# Altium PCB STM_System_Board.PCBDOC (part 13 of 16)
Units mm, origin at the board's own origin, x right, y up, seen from the top; angles counter-clockwise.
Board outline 222.53 x 100.01 mm, 6 copper layers (Top Layer, Int1 (GND), Int2 (Sign), Layer 1, Layer 2, Bottom Layer), stack 1.526 mm thick; 702 components, 774 nets, 3596 pads, 1988 vias.
Unrouted connection lines stored in the file: 1.
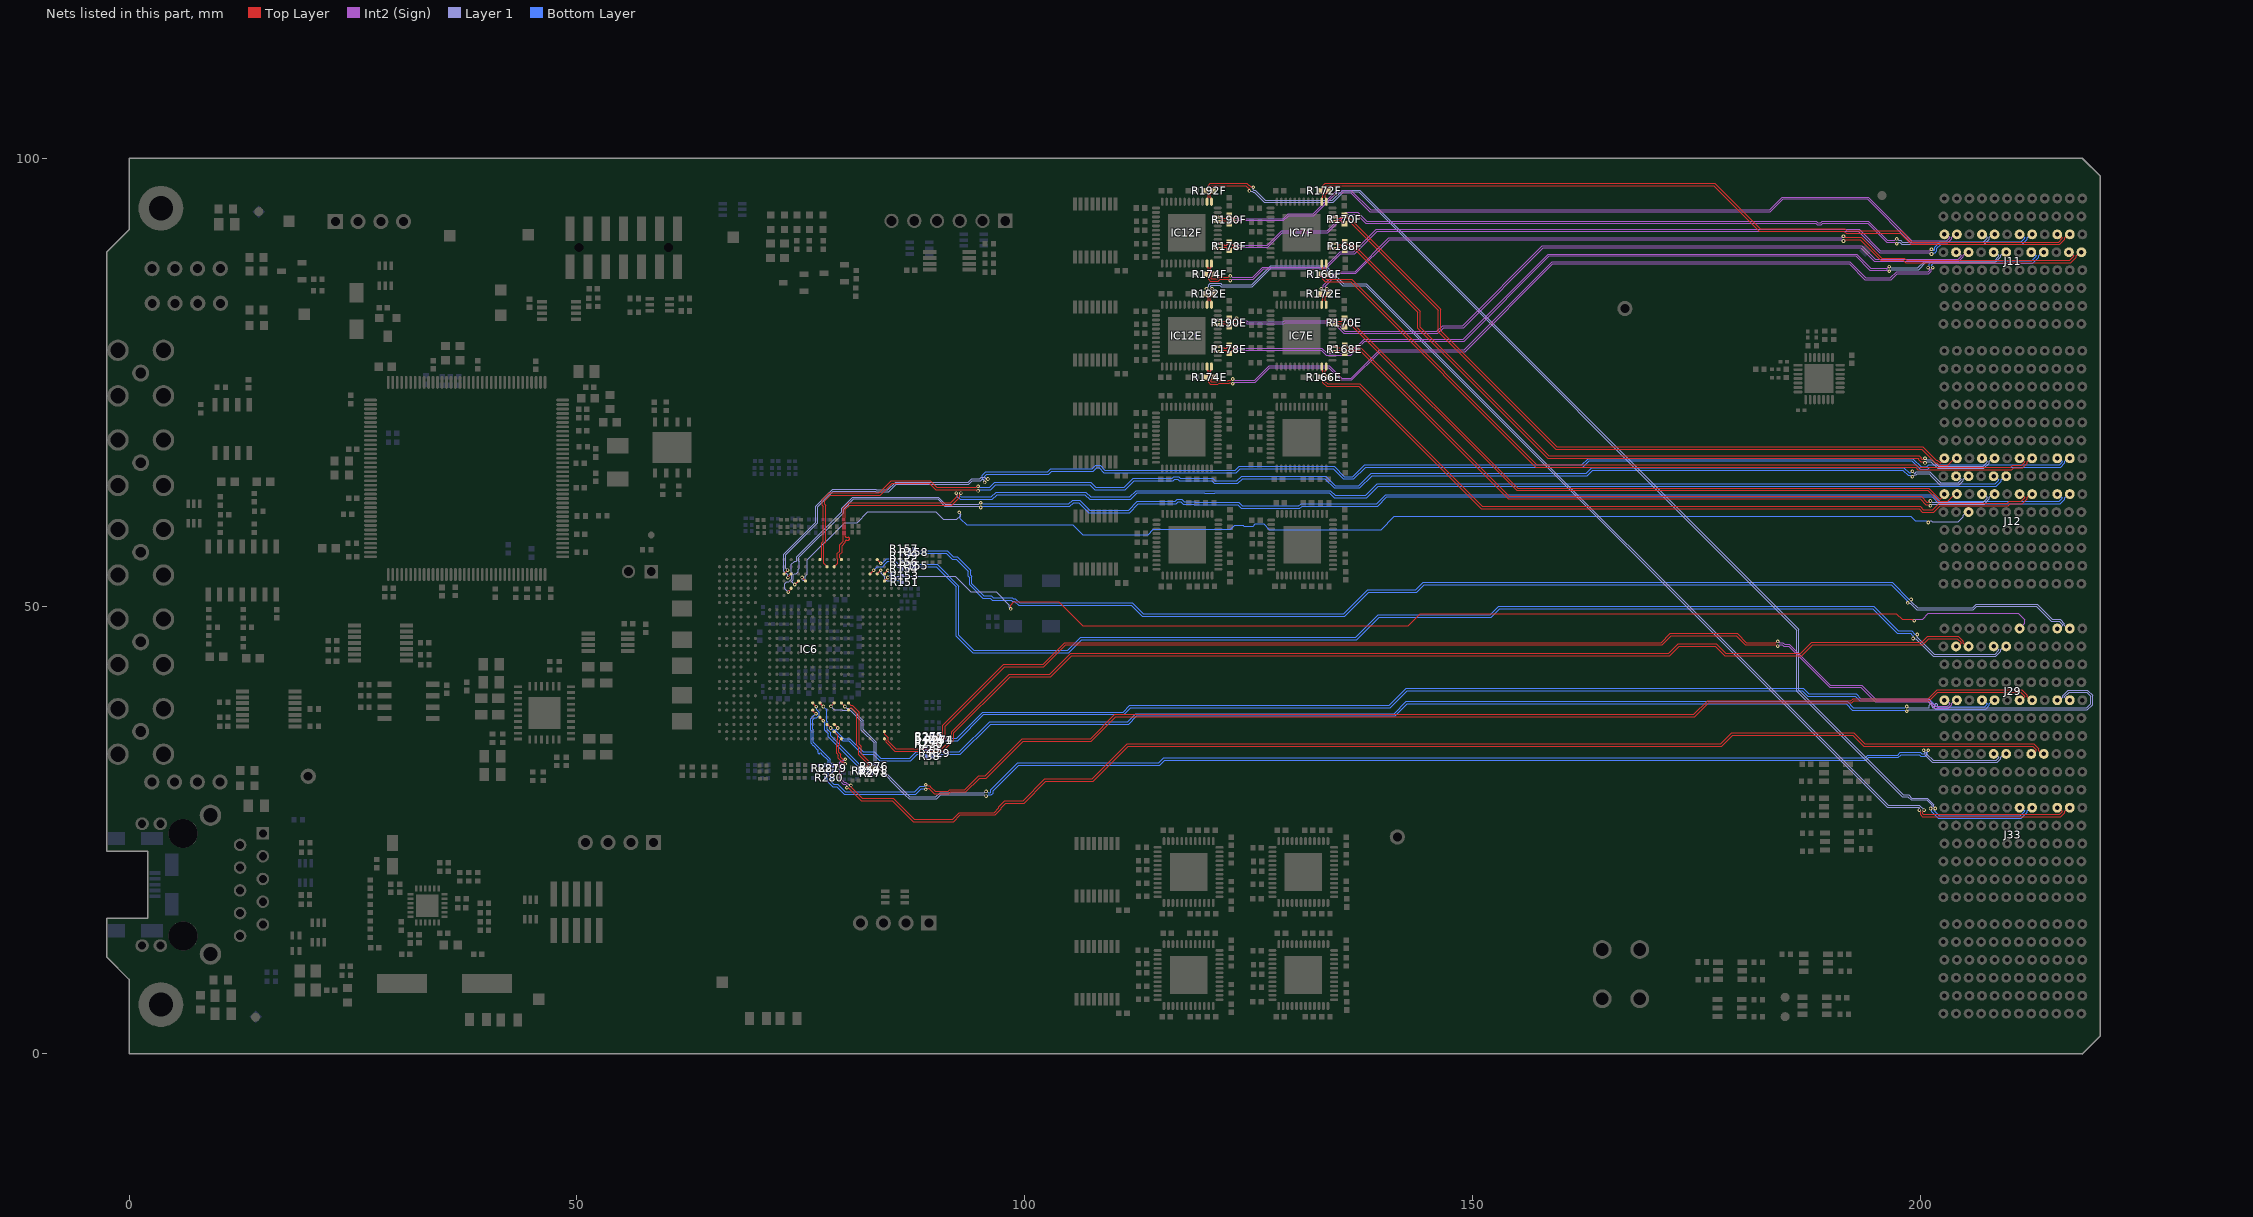
[diagram p16: the nets of this part, all layers, seen from the top]

## Via types
v1: diameter 0.4, hole 0.2, Top Layer to Bottom Layer, tented both sides, 1806 vias
v2: diameter 0.7, hole 0.4, Top Layer to Bottom Layer, tented both sides, 92 vias
v3: diameter 0.7, hole 0.4, Top Layer to Bottom Layer, 90 vias

## Nets (pads, with @x,y where several pads share a name; then routed paths per layer and width w, separated by ;. In a path a pad name is that pad's centre, name@x,y a point inside that pad or via, vN(x,y) a via of type N, cw(c..) or ccw(c..) an arc to the next point about the centre after c; other vN are vias at no path point) (continued)
SLOT5.LVDS_6_P: IC6.P4 J12.J5 | length 140.1
  Top Layer w0.095: v1(75.125,53.2) 75.125,53.174 IC6.P4@75.515,52.784
  Layer 1 w0.102: v1(75.125,53.2) 75.174,53.151 75.174,52.954 75.234,52.894 75.318,52.894 75.477,53.054 75.477,53.314 75.711,53.547 75.711,55.139 79.886,59.314 81.264,59.314 82.475,60.525 90.053,60.525 90.903,59.675 92.407,59.675 92.832,60.1 92.832,60.241 92.675,60.398 v1(92.675,60.45) ; v1(200.85,59.325) 200.865,59.325 201.059,59.519 201.154,59.519 201.262,59.411 204.192,59.411 204.746,59.965 204.746,60.138 205.098,60.49 J12.J5@205.339,60.49
  Bottom Layer w0.095: v1(92.675,60.45) 92.675,60.372 92.805,60.242 92.805,59.768 93.498,59.075 104.295,59.075 104.32,59.1 104.63,59.1 104.655,59.075 105.35,59.075 106.445,57.98 113.757,57.98 114.352,58.575 123.004,58.575 123.431,59.002 124.352,59.002 124.424,58.93 125.475,58.93 125.704,59.159 126.664,59.159 127.289,58.533 139.783,58.533 141.258,60.008 198.889,60.008 199.384,59.514 200.642,59.514 200.831,59.325 v1(200.85,59.325)
SLOT5.LVDS_7_N: IC6.T5 J12.C6 | length 153.5
  Top Layer w0.095: v1(73.575,51.55) 73.575,51.597 73.915,51.937 IC6.T5@73.915,51.984
  Layer 1 w0.102: v1(73.575,51.55) 73.172,51.953 73.172,52.506 73.394,52.728 73.666,52.728 73.784,52.846 73.784,52.875 73.957,53.048 73.957,53.61 74.014,53.667 74.014,53.751 73.937,53.828 73.937,54.657 74.295,55.015 74.489,55.015 74.549,55.074 74.549,55.526 79.55,60.528 79.55,60.914 80.8,62.164 90.336,62.164 91.13,61.37 94.866,61.37 95.023,61.527 v1(95.075,61.527)
  Bottom Layer w0.095: v1(95.075,61.527) 95.153,61.527 95.283,61.397 104.897,61.397 105.317,61.817 106.136,61.817 107.252,60.7 108.075,60.7 111.573,60.7 112.548,61.675 116.774,61.675 116.995,61.897 117.527,61.897 117.798,61.625 118.953,61.625 119,61.578 123.847,61.578 124.25,61.175 130.598,61.175 130.852,61.429 139.252,61.429 140.262,62.439 201.386,62.439 202.125,61.7 215.473,61.7 215.805,62.032 215.805,62.111 215.426,62.49 J12.C6@215.239,62.49
SLOT5.LVDS_7_P: IC6.R4 J12.B6 | length 152.3
  Top Layer w0.095: v1(74.3,52.4) 74.331,52.4 IC6.R4@74.715,52.784
  Layer 1 w0.102: v1(74.3,52.4) 73.998,52.702 73.998,52.786 74.171,52.959 74.171,53.521 74.256,53.606 74.471,53.606 74.693,53.828 74.693,54.096 74.829,54.232 74.829,54.948 74.763,55.015 74.763,55.438 79.764,60.439 79.764,60.825 80.889,61.95 90.247,61.95 91.041,61.157 94.866,61.157 95.023,61 v1(95.075,61)
  Bottom Layer w0.095: v1(95.075,61) 95.153,61 95.283,61.13 105.007,61.13 105.427,61.55 106.025,61.55 107.142,60.433 111.683,60.433 112.658,61.408 116.884,61.408 117.106,61.63 117.416,61.63 117.688,61.358 118.843,61.358 118.889,61.311 123.736,61.311 124.139,60.908 130.708,60.908 130.962,61.162 139.362,61.162 140.373,62.172 201.275,62.172 202.014,61.433 215.584,61.433 216.072,61.921 216.072,62.111 216.452,62.49 J12.B6@216.639,62.49
SLOT5.LVDS_8_N: IC7E.48 J12.F6 R166E.2 | length 87.4
  Top Layer w0.095: IC7E.48@133.629,76.729 133.629,76.388 133.512,76.271 133.512,76.101 133.536,76.077 133.536,75.832 133.592,75.777 133.631,75.777 133.873,75.534 R166E.2@133.873,75.514 133.873,75.494 133.631,75.252 133.592,75.252 133.536,75.196 133.536,75.062 133.798,74.8 137.352,74.8 151.027,61.125 199.925,61.125 200.3,60.75 201.348,60.75 202.079,61.481 204.349,61.481 204.356,61.475 204.922,61.475 204.928,61.481 209.655,61.481 209.876,61.702 211.231,61.702 211.605,62.077 211.605,62.156 211.271,62.49 J12.F6@211.039,62.49
SLOT5.LVDS_8_P: IC7E.47 J12.E6 R166E.1 | length 88.3
  Top Layer w0.095: IC7E.47@133.129,76.729 133.129,76.388 133.246,76.271 133.246,75.991 133.27,75.967 133.27,75.832 133.214,75.777 133.176,75.777 132.933,75.534 R166E.1@132.933,75.514 132.933,75.494 133.176,75.252 133.214,75.252 133.27,75.196 133.27,74.951 133.688,74.533 137.242,74.533 150.917,60.858 199.814,60.858 200.189,60.483 201.458,60.483 202.189,61.214 204.239,61.214 204.245,61.208 205.032,61.208 205.039,61.214 209.765,61.214 209.986,61.436 211.341,61.436 211.872,61.967 211.872,62.156 212.206,62.49 J12.E6@212.439,62.49
SLOT5.LVDS_9_N: IC7E.4 J12.I6 R168E.2 | length 81.8
  Top Layer w0.095: IC7E.4@134.329,78.929 134.67,78.929 134.787,78.813 135.026,78.813 135.03,78.817 135.363,78.817 135.418,78.873 135.418,78.911 135.661,79.154 R168E.2@135.681,79.154 135.701,79.154 135.943,78.911 135.943,78.873 135.999,78.817 137.511,78.817 154.078,62.25 200.036,62.25 200.691,61.595 200.867,61.595 200.997,61.725 v1(201.075,61.725)
  Layer 1 w0.102: v1(201.075,61.725) 201.127,61.725 201.284,61.568 202.088,61.568 202.119,61.6 206.978,61.6 207.432,62.054 207.432,62.138 207.08,62.49 J12.I6@206.839,62.49
SLOT5.LVDS_9_P: IC7E.3 J12.H6 R168E.1 | length 82.1
  Top Layer w0.095: IC7E.3@134.329,78.429 134.67,78.429 134.787,78.546 135.136,78.546 135.141,78.55 135.363,78.55 135.418,78.495 135.418,78.456 135.661,78.214 R168E.1@135.681,78.214 135.701,78.214 135.943,78.456 135.943,78.495 135.999,78.55 137.4,78.55 153.967,61.983 199.925,61.983 200.581,61.328 200.867,61.328 200.997,61.198 v1(201.075,61.198)
  Layer 1 w0.102: v1(201.075,61.198) 201.127,61.198 201.284,61.355 202.176,61.355 202.208,61.386 207.067,61.386 207.646,61.965 207.646,62.138 207.998,62.49 J12.H6@208.239,62.49
SLOT5.LVDS_10_N: IC7E.10 J12.L6 R170E.2 | length 77.2
  Top Layer w0.095: IC7E.10@134.329,81.929 134.67,81.929 134.787,81.813 135.032,81.813 135.064,81.781 135.358,81.781 135.413,81.836 135.413,81.875 135.656,82.117 R170E.2@135.676,82.117 135.696,82.117 135.938,81.875 135.938,81.836 135.994,81.781 136.397,81.781 155.012,63.166 200.884,63.166 202.08,61.97 202.258,61.97 202.639,62.351 J12.L6@202.639,62.49
SLOT5.LVDS_10_P: IC7E.9 J12.K6 R170E.1 | length 78.6
  Top Layer w0.095: IC7E.9@134.329,81.429 134.67,81.429 134.787,81.546 134.921,81.546 134.954,81.514 135.358,81.514 135.413,81.458 135.413,81.42 135.656,81.177 R170E.1@135.676,81.177 135.696,81.177 135.938,81.42 135.938,81.458 135.994,81.514 136.286,81.514 154.901,62.899 200.774,62.899 201.969,61.703 203.02,61.703 203.806,62.49 J12.K6@204.039,62.49
SLOT5.LVDS_11_N: IC7E.14 J11.B5 R172E.2 | length 90.7
  Top Layer w0.095: v1(133.092,85.417) 133.092,84.988 R172E.2@132.935,84.832 132.935,84.812 133.178,84.569 133.216,84.569 133.272,84.513 133.272,84.359 133.246,84.332 133.246,84.088 133.129,83.971 IC7E.14@133.129,83.629 ; v1(191.375,91.275) 191.453,91.275 191.583,91.145 193.355,91.145 195.653,88.847 198.16,88.847 198.435,88.572 216.645,88.572 217.105,89.032 217.105,89.111 216.726,89.49 J11.B5@216.539,89.49
  Int2 (Sign) w0.102: v1(133.092,85.417) 133.298,85.625 133.298,85.797 134.84,87.339 136.85,87.339 140.625,91.114 190.269,91.114 190.274,91.118 191.166,91.118 191.323,91.275 v1(191.375,91.275)
SLOT5.LVDS_11_P: IC7E.13 J11.A5 R172E.1 | length 90.8
  Top Layer w0.095: IC7E.13@133.629,83.629 133.629,83.985 133.512,84.101 133.512,84.222 133.539,84.248 133.539,84.513 133.594,84.569 133.633,84.569 133.875,84.812 R172E.1@133.875,84.832 133.719,84.988 v1(133.719,85.417) ; v1(191.375,90.748) 191.453,90.748 191.583,90.878 193.245,90.878 195.543,88.58 198.049,88.58 198.324,88.305 216.756,88.305 217.372,88.921 217.372,89.111 217.752,89.49 J11.A5@217.939,89.49
  Int2 (Sign) w0.102: v1(133.719,85.417) 133.512,85.625 133.512,85.709 134.929,87.125 136.939,87.125 140.714,90.9 190.358,90.9 190.362,90.905 191.166,90.905 191.323,90.748 v1(191.375,90.748)
SLOT5.LVDS_12_N: IC12E.48 J11.E5 R174E.2 | length 104.1
  Top Layer w0.095: IC12E.48@120.829,76.729 120.829,76.388 120.712,76.271 120.712,76.142 120.772,76.081 120.772,75.837 120.828,75.781 120.867,75.781 121.109,75.538 R174E.2@121.109,75.518 121.109,75.498 120.867,75.256 120.828,75.256 120.772,75.2 120.772,75.066 120.828,75.01 121.436,75.01 121.576,75.15 122.687,75.15 122.747,75.21 122.992,75.21 123.122,75.34 v1(123.2,75.34)
  Int2 (Sign) w0.102: v1(123.2,75.34) 123.252,75.34 123.409,75.183 125.633,75.183 127.263,76.813 133.99,76.813 135.353,75.45 136.425,75.45 139.589,78.614 149.061,78.614 158.861,88.414 192.086,88.414 193.861,86.639 196.611,86.639 197.299,87.326 200.824,87.326 200.98,87.482 200.98,87.566 200.823,87.723 v1(200.823,87.775)
  Bottom Layer w0.095: v1(200.823,87.775) 200.823,87.853 200.953,87.983 200.953,88.228 201.267,88.542 212.415,88.542 212.905,89.032 212.905,89.111 212.526,89.49 J11.E5@212.339,89.49
SLOT5.LVDS_12_P: IC12E.47 J11.D5 R174E.1 | length 104.9
  Top Layer w0.095: IC12E.47@120.329,76.729 120.329,76.388 120.446,76.271 120.446,76.031 120.506,75.971 120.506,75.837 120.45,75.781 120.412,75.781 120.169,75.538 R174E.1@120.169,75.518 120.169,75.498 120.412,75.256 120.45,75.256 120.506,75.2 120.506,74.955 120.718,74.744 121.546,74.744 121.686,74.883 122.798,74.883 122.858,74.943 122.992,74.943 123.122,74.813 v1(123.2,74.813)
  Int2 (Sign) w0.102: v1(123.2,74.813) 123.252,74.813 123.409,74.969 125.722,74.969 127.351,76.599 133.901,76.599 135.264,75.236 136.514,75.236 139.678,78.4 149.15,78.4 158.95,88.2 191.997,88.2 193.772,86.425 196.7,86.425 197.387,87.112 200.912,87.112 201.193,87.393 201.193,87.566 201.35,87.723 v1(201.35,87.775)
  Bottom Layer w0.095: v1(201.35,87.775) 201.35,87.853 201.22,87.983 201.22,88.118 201.377,88.275 212.526,88.275 213.172,88.921 213.172,89.111 213.552,89.49 J11.D5@213.739,89.49
SLOT5.LVDS_13_N: IC12E.4 J11.H5 R178E.2 | length 94.7
  Top Layer w0.095: IC12E.4@121.529,78.929 121.87,78.929 121.987,78.813 122.232,78.813 122.252,78.792 122.514,78.792 122.57,78.848 122.57,78.887 122.812,79.129 R178E.2@122.832,79.129 122.852,79.129 123.095,78.887 123.095,78.849 123.151,78.793 123.336,78.793 123.515,78.973 v1(123.544,78.973)
  Int2 (Sign) w0.102: v1(123.544,78.973) 123.547,78.973 123.753,78.767 133.158,78.767 133.736,78.189 136.261,78.189 137.867,79.794 148.942,79.794 158.436,89.289 192.836,89.289 194.403,87.722 196.091,87.722 196.094,87.725 196.252,87.725 196.423,87.895 v1(196.475,87.895)
  Layer 1 w0.102: v1(196.475,87.895) 196.527,87.895 196.684,87.739 199.664,87.739 200.489,88.564 208.242,88.564 208.732,89.054 208.732,89.138 208.38,89.49 J11.H5@208.139,89.49
SLOT5.LVDS_13_P: IC12E.3 J11.G5 R178E.1 | length 95.1
  Top Layer w0.095: IC12E.3@121.529,78.429 121.87,78.429 121.987,78.546 122.121,78.546 122.142,78.526 122.514,78.526 122.57,78.47 122.57,78.432 122.812,78.189 R178E.1@122.832,78.189 122.852,78.189 123.095,78.432 123.095,78.47 123.152,78.527 123.336,78.527 123.515,78.347 v1(123.544,78.347)
  Int2 (Sign) w0.102: v1(123.544,78.347) 123.547,78.347 123.753,78.553 133.069,78.553 133.647,77.975 136.35,77.975 137.955,79.58 149.03,79.58 158.525,89.075 192.747,89.075 194.314,87.508 196.179,87.508 196.182,87.511 196.266,87.511 196.409,87.368 v1(196.475,87.368)
  Layer 1 w0.102: v1(196.475,87.368) 196.527,87.368 196.684,87.525 199.753,87.525 200.578,88.35 208.331,88.35 208.946,88.965 208.946,89.138 209.298,89.49 J11.G5@209.539,89.49
SLOT5.LVDS_14_N: IC12E.10 J11.K5 R190E.2 | length 89.7
  Top Layer w0.095: IC12E.10@121.529,81.929 121.87,81.929 121.987,81.813 122.232,81.813 122.265,81.78 122.514,81.78 122.569,81.836 122.569,81.874 122.812,82.117 R190E.2@122.832,82.117 122.852,82.117 123.124,81.845 123.229,81.845 123.241,81.857 123.43,81.857 123.624,82.051 v1(123.624,82.114)
  Int2 (Sign) w0.102: v1(123.624,82.114) 123.907,81.831 124.781,81.831 124.88,81.732 128.832,81.732 128.957,81.857 134.496,81.857 135.706,80.647 145.987,80.647 146.64,81.3 148.872,81.3 157.761,90.189 193.411,90.189 194.911,88.689 195.627,88.689 195.63,88.692 196.12,88.692 196.123,88.689 204.167,88.689 204.532,89.054 204.532,89.138 204.18,89.49 J11.K5@203.939,89.49
SLOT5.LVDS_14_P: IC12E.9 J11.J5 R190E.1 | length 90.2
  Top Layer w0.095: IC12E.9@121.529,81.429 121.87,81.429 121.987,81.546 122.121,81.546 122.154,81.513 122.514,81.513 122.569,81.458 122.569,81.419 122.812,81.177 R190E.1@122.832,81.177 122.852,81.177 123.094,81.419 123.094,81.458 123.215,81.578 123.339,81.578 123.351,81.59 123.43,81.59 123.624,81.396 v1(123.624,81.333)
  Int2 (Sign) w0.102: v1(123.624,81.333) 123.907,81.617 124.693,81.617 124.791,81.518 128.92,81.518 129.045,81.643 134.407,81.643 135.617,80.433 146.076,80.433 146.729,81.086 148.961,81.086 157.85,89.975 193.322,89.975 194.822,88.475 195.716,88.475 195.719,88.478 196.031,88.478 196.034,88.475 204.256,88.475 204.746,88.965 204.746,89.138 205.098,89.49 J11.J5@205.339,89.49
SLOT5.LVDS_15_N: IC12E.14 J33.C6 R192E.2 | length 125.6
  Top Layer w0.095: v1(120.269,85.417) 120.269,85.01 R192E.2@120.112,84.854 120.112,84.834 120.355,84.591 120.393,84.591 120.449,84.536 120.449,84.336 120.446,84.332 120.446,84.088 120.329,83.971 IC12E.14@120.329,83.629 ; v1(200.376,27.226) 200.376,27.149 200.246,27.018 200.246,26.827 200.308,26.765 215.539,26.765 215.805,27.032 215.805,27.111 215.426,27.49 J33.C6@215.239,27.49
  Layer 1 w0.102: v1(120.269,85.417) 120.269,85.442 120.506,85.678 120.506,85.842 120.691,86.027 121.84,86.027 122.003,85.864 125.314,85.864 127.439,87.989 133.564,87.989 135.578,85.975 138.128,85.975 196.355,27.747 198.699,27.747 198.724,27.771 199.855,27.771 200.376,27.25 v1(200.376,27.226)
SLOT5.LVDS_15_P: IC12E.13 J33.B6 R192E.1 | length 125.7
  Top Layer w0.095: IC12E.13@120.829,83.629 120.829,83.971 120.712,84.088 120.712,84.222 120.716,84.225 120.716,84.536 120.771,84.591 120.81,84.591 121.052,84.834 R192E.1@121.052,84.854 120.889,85.017 v1(120.889,85.424) ; v1(199.848,27.225) 199.848,27.148 199.979,27.017 199.979,26.717 200.197,26.499 215.649,26.499 216.072,26.921 216.072,27.111 216.452,27.49 J33.B6@216.639,27.49
  Layer 1 w0.102: v1(120.889,85.424) 120.889,85.463 120.72,85.633 120.72,85.753 120.779,85.813 121.751,85.813 121.914,85.65 125.403,85.65 127.528,87.775 133.475,87.775 135.489,85.761 138.039,85.761 196.267,27.533 198.788,27.533 198.812,27.557 199.766,27.557 199.826,27.498 199.826,27.247 v1(199.848,27.225)
SLOT5.LVDSr0_N: IC6.H21 R261.1 | length 8.5
  Top Layer w0.095: IC6.H21@80.315,39.184 80.315,39.148 80.546,38.917 80.735,38.917 81.517,38.136 81.517,34.561 81.725,34.352 81.725,33.483 82.556,32.652 82.58,32.652 82.792,32.44 82.792,32.195 82.848,32.139 82.882,32.139 83.045,31.977 R261.1@83.045,31.957
SLOT5.LVDSr0_P: IC6.H22 R259.1 | length 8.1
  Top Layer w0.095: IC6.H22@80.315,38.384 80.315,38.42 80.546,38.651 80.624,38.651 81.25,38.025 81.25,34.45 81.458,34.242 81.458,33.372 82.445,32.385 82.47,32.385 82.525,32.329 82.525,32.195 82.47,32.139 82.435,32.139 82.273,31.977 R259.1@82.273,31.957
SLOT5.LVDSr1_N: IC6.M23 R278.1 | length 9.1
  Top Layer w0.095: IC6.M23@77.09,37.584 v1(77.49,37.184)
  Bottom Layer w0.095: v1(77.49,37.184) 77.49,37.135 77.649,36.976 77.649,36.143 78.05,35.742 78.05,35.434 81.912,31.572 82.605,31.572 82.661,31.516 82.661,31.481 82.823,31.318 R278.1@82.843,31.318
SLOT5.LVDSr1_P: IC6.M21 R276.1 | length 10.3
  Top Layer w0.095: IC6.M21@77.115,39.184 v1(77.515,38.784)
  Bottom Layer w0.095: v1(77.515,38.784) 77.889,38.41 77.889,37.112 77.915,37.086 77.915,36.254 78.317,35.853 78.317,35.544 82.022,31.839 82.607,31.839 82.663,31.894 82.663,31.928 82.825,32.09 R276.1@82.845,32.09
SLOT5.LVDSr3_N: IC6.C3 R153.1 | length 2.6
  Top Layer w0.095: IC6.C3@84.315,53.584 v1(84.715,53.984)
  Bottom Layer w0.095: v1(84.715,53.984) 84.715,53.909 84.906,53.717 85.095,53.717 85.654,53.159 86.004,53.159 86.06,53.214 86.06,53.23 86.223,53.393 R153.1@86.243,53.393
SLOT5.LVDSr3_P: IC6.C4 R151.1 | length 2.5
  Top Layer w0.095: IC6.C4@84.315,52.784 v1(84.715,53.184)
  Bottom Layer w0.095: v1(84.715,53.184) 84.715,53.259 84.906,53.451 84.985,53.451 85.543,52.892 86,52.892 86.056,52.836 86.056,52.728 R151.1@86.128,52.656
SLOT6.LVDS_0_N: J29.C4 R29.1 R38.2 | length 138.6
  Layer 1 w0.102: v1(198.45,38.255) 198.502,38.255 198.659,38.411 218.614,38.411 219.189,38.986 219.189,40.039 218.614,40.614 216.467,40.614 215.832,39.979 215.832,39.806 215.772,39.747 215.766,39.747 215.509,39.49 J29.C4@215.239,39.49
  Bottom Layer w0.095: R38.2@89.701,33.216 89.721,33.216 89.884,33.378 89.884,33.413 89.939,33.469 90.298,33.469 R29.1@90.49,33.277 ; R29.1@90.49,33.257 R29.1@90.49,33.277 ; v1(198.45,38.255) 198.372,38.255 198.242,38.385 195.44,38.385 195.439,38.383 192.364,38.383 191.664,39.083 142.683,39.083 141.325,37.725 112.5,37.725 111.6,36.825 96.177,36.825 92.806,33.454 90.708,33.454 90.694,33.44 90.653,33.44 R29.1@90.49,33.277
SLOT6.LVDS_0_P: J29.B4 R28.2 R29.2 | length 138.9
  Layer 1 w0.102: v1(198.45,38.782) 198.502,38.782 198.659,38.625 200.775,38.625 200.826,38.625 ccw(c200.826,38.776) 200.977,38.776 200.977,38.945 cw(c201.127,38.945) 201.278,38.945 201.278,38.776 ccw(c201.429,38.776) 201.58,38.776 201.58,38.945 cw(c201.731,38.945) 201.881,38.945 201.881,38.776 ccw(c202.032,38.776) 202.032,38.625 202.4,38.625 218.525,38.625 218.975,39.075 218.975,39.95 218.525,40.4 216.556,40.4 216.046,39.89 216.046,39.806 216.105,39.747 216.112,39.747 216.369,39.49 J29.B4@216.639,39.49
  Bottom Layer w0.095: R28.2@89.696,33.986 89.716,33.986 89.878,33.824 89.878,33.791 89.934,33.736 90.328,33.736 90.49,33.898 R29.2@90.49,33.917 ; R29.2@90.49,33.897 90.653,33.735 90.694,33.735 90.708,33.72 92.695,33.72 96.067,37.092 111.489,37.092 112.389,37.992 141.214,37.992 142.573,39.35 191.775,39.35 192.475,38.65 195.328,38.65 195.33,38.651 198.242,38.651 198.372,38.782 v1(198.45,38.782)
SLOT6.LVDS_1_N: J29.F4 R280.1 R281.2 | length 141.9
  Top Layer w0.095: v1(88.925,29.528) 89.003,29.528 89.133,29.658 89.266,29.658 89.4,29.524 89.865,29.059 91.542,29.059 91.734,29.25 93.425,29.25 94.975,30.8 95.702,30.8 99.836,34.933 107.436,34.933 110.161,37.658 174.786,37.658 176.311,39.183 192.325,39.183 192.55,39.408 200.961,39.408 201.927,40.375 211.178,40.375 211.605,39.948 211.605,39.869 211.226,39.49 J29.F4@211.039,39.49
  Bottom Layer w0.095: R281.2@77.775,31.57 77.775,31.55 77.938,31.388 77.972,31.388 78.028,31.332 78.028,31.054 78.002,31.029 78.002,30.988 R280.1@77.84,30.825 ; R280.1@77.82,30.825 R280.1@77.84,30.825 ; v1(88.925,29.528) 88.872,29.528 88.775,29.625 88.427,29.625 87.811,29.008 79.863,29.008 79.022,29.85 78.529,29.85 78.017,30.362 78.017,30.607 78.002,30.621 78.002,30.663 R280.1@77.84,30.825
SLOT6.LVDS_1_P: J29.E4 R279.2 R280.2 | length 141.9
  Top Layer w0.095: v1(88.925,30.055) 89.003,30.055 89.133,29.925 89.377,29.925 89.511,29.791 89.976,29.325 91.432,29.325 91.623,29.517 93.314,29.517 94.864,31.067 95.592,31.067 99.725,35.2 107.325,35.2 110.05,37.925 174.675,37.925 176.2,39.45 192.214,39.45 192.439,39.675 200.85,39.675 201.817,40.642 211.289,40.642 211.872,40.058 211.872,39.869 212.252,39.49 J29.E4@212.439,39.49
  Bottom Layer w0.095: R280.2@78.48,30.825 R280.2@78.46,30.825 ; R279.2@78.547,31.57 78.547,31.55 78.384,31.388 78.35,31.388 78.294,31.332 78.294,31.043 78.297,31.04 78.297,30.988 R280.2@78.46,30.825 ; v1(88.925,30.055) 88.925,30.042 88.775,29.892 88.317,29.892 87.7,29.275 79.974,29.275 79.132,30.117 78.639,30.117 78.283,30.473 78.283,30.607 78.297,30.621 78.297,30.663 R280.2@78.46,30.825
SLOT6.LVDS_2_N: IC6.J26 J29.E1 | length 146.8
  Top Layer w0.095: IC6.J26@79.515,35.184 79.331,35.001 79.331,34.532 79.248,34.449 79.248,33.66 79.439,33.47 79.439,33.12 79.666,32.893 79.946,32.893 v1(79.953,32.9) ; v1(80.13,29.705) 80.188,29.646 80.361,29.646 80.903,29.105 81.749,28.258 85.214,28.258 87.539,25.933 92.061,25.933 92.811,26.683 96.686,26.683 97.367,27.364 97.367,27.5 97.878,28.011 99.914,28.011 102.352,30.45 107.632,30.45 111.54,34.358 177.761,34.358 178.999,35.597 192.403,35.597 193.642,34.358 212.495,34.358 212.905,33.948 212.905,33.869 212.526,33.49 J29.E1@212.339,33.49
  Int2 (Sign) w0.102: v1(79.953,32.9) 79.902,32.9 79.744,32.742 79.523,32.742 79.336,32.556 79.336,30.535 79.748,30.123 79.943,30.123 80.098,29.968 80.098,29.736 v1(80.13,29.705)
SLOT6.LVDS_2_P: IC6.K25 J29.D1 | length 147.9
  Top Layer w0.095: IC6.K25@78.715,35.984 79.103,35.596 79.103,35.15 79.064,35.111 79.064,34.642 78.982,34.56 78.982,33.549 79.172,33.359 79.172,33.009 79.555,32.626 79.697,32.626 79.95,32.373 v1(79.954,32.373) ; v1(80.581,29.977) 80.639,29.919 80.639,29.746 81.169,29.216 81.86,28.525 85.325,28.525 87.65,26.2 91.95,26.2 92.7,26.95 96.575,26.95 97.1,27.475 97.1,27.611 97.768,28.278 99.803,28.278 102.242,30.717 107.521,30.717 109.552,32.748 111.43,34.625 177.65,34.625 178.889,35.864 192.514,35.864 193.752,34.625 212.606,34.625 213.172,34.058 213.172,33.869 213.552,33.49 J29.D1@213.739,33.49
  Int2 (Sign) w0.102: v1(79.954,32.373) 79.901,32.373 79.745,32.529 79.611,32.529 79.55,32.467 79.55,30.624 79.836,30.337 80.031,30.337 80.339,30.03 80.528,30.03 v1(80.581,29.977)
SLOT6.LVDS_3_N: J29.H7 R155.1 R156.2 | length 134.8
  Layer 1 w0.102: v1(199.614,46.821) 199.61,46.817 199.61,46.522 201.506,44.625 208.303,44.625 208.732,45.054 208.732,45.138 208.38,45.49 J29.H7@208.139,45.49
  Bottom Layer w0.095: R156.2@86.888,54.913 86.908,54.913 87.07,54.75 87.07,54.713 87.136,54.646 87.452,54.646 87.466,54.66 87.507,54.66 R155.1@87.67,54.823 ; R155.1@87.67,54.843 R155.1@87.67,54.823 ; v1(199.614,46.821) 199.585,46.851 199.349,46.851 199.279,46.921 198.983,47.217 197.508,47.217 194.75,49.975 152.923,49.975 151.948,49 139.448,49 136.948,46.5 106.248,46.5 104.789,45.042 94.308,45.042 92.617,46.733 92.617,52.235 90.206,54.646 87.888,54.646 87.874,54.66 87.832,54.66 R155.1@87.67,54.823
SLOT6.LVDS_3_P: J29.G7 R154.2 R155.2 | length 135.1
  Layer 1 w0.102: v1(199.15,46.375) 199.154,46.371 199.458,46.371 201.418,44.411 208.392,44.411 208.946,44.965 208.946,45.138 209.298,45.49 J29.G7@209.539,45.49
  Bottom Layer w0.095: R154.2@86.889,54.134 86.909,54.134 87.071,54.296 87.071,54.324 87.127,54.38 87.452,54.38 87.466,54.365 87.507,54.365 R155.2@87.67,54.203 ; R155.2@87.67,54.183 R155.2@87.67,54.203 ; v1(199.15,46.375) 199.161,46.386 199.161,46.662 199.012,46.811 198.873,46.95 197.398,46.95 194.64,49.708 153.033,49.708 152.058,48.733 139.558,48.733 137.058,46.233 106.358,46.233 104.9,44.775 94.198,44.775 92.35,46.623 92.35,52.125 90.095,54.38 87.888,54.38 87.874,54.365 87.832,54.365 R155.2@87.67,54.203
SLOT6.LVDS_4_N: IC6.C26 J29.K7 | length 128.5
  Top Layer w0.095: IC6.C26@84.315,35.184 84.499,35.001 84.499,34.776 85.5,33.775 90.825,33.775 92.075,35.025 92.075,35.85 98.358,42.133 102.908,42.133 105.233,44.458 171.961,44.458 173.027,45.525 177.046,45.525 178.113,44.458 179.4,44.458 186.708,44.458 187.95,45.7 200.227,45.7 200.877,46.35 204.103,46.35 204.505,45.948 204.505,45.869 204.126,45.49 J29.K7@203.939,45.49
SLOT6.LVDS_4_P: IC6.C25 J29.J7 | length 129.4
  Top Layer w0.095: IC6.C25@84.315,35.984 84.363,35.936 84.363,35.676 84.765,35.274 84.765,34.887 85.611,34.042 90.714,34.042 91.808,35.136 91.808,35.961 98.248,42.4 102.798,42.4 105.123,44.725 171.85,44.725 172.917,45.792 177.156,45.792 178.223,44.725 186.598,44.725 187.839,45.967 200.117,45.967 200.767,46.617 204.214,46.617 204.772,46.058 204.772,45.869 205.152,45.49 J29.J7@205.339,45.49
SLOT6.LVDS_5_N: IC6.J1 J12.H7 | length 139.3
  Top Layer w0.095: IC6.J1@79.515,55.184 79.331,55.367 79.331,55.756 79.603,56.028 79.603,56.725 79.603,56.751 79.967,57.114 79.967,57.215 cw(c80.114,57.215) 80.114,57.363 80.291,57.363 ccw(c80.291,57.51) 80.291,57.658 80.114,57.658 cw(c80.114,57.805) 79.967,57.805 79.967,58.1 79.967,60.792 80.433,61.258 91.828,61.258 92.725,62.156 92.725,62.401 92.855,62.531 v1(92.855,62.609)
  Bottom Layer w0.095: v1(92.855,62.609) 92.784,62.609 92.725,62.55 92.725,62.325 92.875,62.175 96.273,62.175 96.789,62.692 106.808,62.692 107.325,62.175 111.698,62.175 112.414,62.892 120.151,62.892 120.19,62.853 121.088,62.853 121.127,62.892 134.111,62.892 134.627,62.375 138.073,62.375 139.348,63.65 208.323,63.65 208.705,64.032 208.705,64.111 208.326,64.49 J12.H7@208.139,64.49
SLOT6.LVDS_5_P: IC6.K2 J12.G7 | length 140.4
  Top Layer w0.095: IC6.K2@78.715,54.384 79.103,54.772 79.103,55.218 79.064,55.257 79.064,55.867 79.336,56.139 79.336,56.861 79.7,57.225 79.7,60.902 80.323,61.525 91.717,61.525 92.458,62.266 92.458,62.401 92.328,62.531 v1(92.328,62.609)
  Bottom Layer w0.095: v1(92.328,62.609) 92.399,62.609 92.458,62.55 92.458,62.214 92.765,61.908 96.383,61.908 96.9,62.425 106.698,62.425 107.214,61.908 111.808,61.908 112.525,62.625 120.04,62.625 120.08,62.586 121.198,62.586 121.238,62.625 134,62.625 134.517,62.108 138.183,62.108 139.458,63.383 208.434,63.383 208.972,63.921 208.972,64.111 209.352,64.49 J12.G7@209.539,64.49
SLOT6.LVDS_6_N: IC6.M1 J12.K7 | length 139.8
  Top Layer w0.095: IC6.M1@77.115,55.184 77.299,55.367 77.299,57.061 77.483,57.245 77.483,61.16 77.384,61.259 77.384,61.841 78.185,62.642 83.717,62.642 85.067,63.992 89.408,63.992 90.15,63.25 94.567,63.25 94.697,63.38 v1(94.775,63.38)
  Layer 1 w0.102: v1(199.075,65.036) 199.113,65.036 199.301,64.847 199.385,64.847 199.508,64.97 201.029,64.97 201.228,64.772 202.237,63.762 204.204,63.762 204.532,64.09 204.532,64.174 204.472,64.233 204.466,64.233 204.209,64.49 J12.K7@203.939,64.49
  Bottom Layer w0.095: v1(94.775,63.38) 94.853,63.38 94.983,63.25 96.1,63.25 96.642,63.792 107.344,63.792 107.885,63.25 111.096,63.25 112.088,64.242 116.46,64.242 116.634,64.416 117.166,64.416 117.34,64.242 117.984,64.242 117.997,64.255 119.463,64.255 119.475,64.242 120.97,64.242 121.238,63.975 123.673,63.975 124.195,64.497 133.605,64.497 134.652,63.45 137.273,63.45 138.648,64.825 162.673,64.825 163.298,65.45 198.105,65.45 198.7,64.855 198.861,64.855 199.042,65.036 v1(199.075,65.036)
SLOT6.LVDS_6_P: IC6.L2 J12.J7 | length 140.6
  Top Layer w0.095: IC6.L2@77.915,54.384 77.527,54.772 77.527,55.218 77.565,55.257 77.565,56.95 77.75,57.135 77.75,61.27 77.651,61.37 77.651,61.73 78.295,62.375 83.827,62.375 85.177,63.725 89.298,63.725 90.039,62.983 94.567,62.983 94.697,62.853 v1(94.775,62.853)
  Layer 1 w0.102: v1(199.075,64.436) 199.135,64.436 199.332,64.633 199.474,64.633 199.597,64.757 200.94,64.757 201.139,64.558 202.149,63.548 204.293,63.548 204.746,64.001 204.746,64.174 204.805,64.233 204.812,64.233 205.069,64.49 J12.J7@205.339,64.49
  Bottom Layer w0.095: v1(94.775,62.853) 94.853,62.853 94.983,62.983 96.211,62.983 96.752,63.525 107.233,63.525 107.775,62.983 111.206,62.983 112.199,63.975 116.571,63.975 116.745,64.15 117.055,64.15 117.229,63.975 118.095,63.975 118.107,63.988 119.352,63.988 119.364,63.975 120.86,63.975 121.127,63.708 123.783,63.708 124.305,64.23 133.495,64.23 134.542,63.183 137.383,63.183 138.758,64.558 162.783,64.558 163.408,65.183 197.994,65.183 198.589,64.588 198.867,64.588 199.019,64.436 v1(199.075,64.436)
SLOT6.LVDS_7_N: IC6.U3 J12.C8 | length 154.5
  Top Layer w0.095: IC6.U3@73.115,53.609 v1(73.515,54.009)
  Layer 1 w0.102: v1(73.515,54.009) 73.513,54.009 73.307,54.215 73.307,54.217 73.3,54.224 73.3,55.7 76.875,59.275 76.875,61.073 78.614,62.811 83.277,62.811 83.33,62.758 84.808,62.758 85.65,63.6 93.741,63.6 94.144,64.003 95.061,64.003 95.213,64.155 95.371,64.155 95.465,64.061 95.465,63.839 v1(95.502,63.802)
  Bottom Layer w0.095: v1(95.502,63.802) 95.447,63.858 95.447,64.042 95.234,64.255 95.234,64.611 95.614,64.992 102.539,64.992 102.886,65.339 107.407,65.339 107.536,65.339 107.889,65.692 108.394,65.692 108.941,65.145 123.509,65.145 123.945,65.581 134.519,65.581 135.65,64.45 136.598,64.45 137.923,65.775 162.173,65.775 162.864,66.467 199.133,66.467 200.075,65.526 200.66,65.526 200.9,65.765 215.494,65.765 215.805,66.077 215.805,66.156 215.471,66.49 J12.C8@215.239,66.49
SLOT6.LVDS_7_P: IC6.T3 J12.B8 | length 155.7
  Top Layer w0.095: v1(73.55,53.175) 73.55,53.197 73.934,53.581 IC6.T3@73.934,53.585
  Layer 1 w0.102: v1(73.55,53.175) 73.505,53.22 73.505,53.484 73.093,53.897 73.093,54.129 73.086,54.135 73.086,55.789 76.661,59.364 76.661,61.161 78.525,63.025 83.366,63.025 83.419,62.972 84.72,62.972 85.561,63.814 93.652,63.814 94.055,64.217 94.972,64.217 95.124,64.369 95.46,64.369 95.617,64.212 95.838,64.212 v1(95.875,64.175)
  Bottom Layer w0.095: v1(95.875,64.175) 95.82,64.23 95.636,64.23 95.5,64.365 95.5,64.5 95.725,64.725 102.65,64.725 102.997,65.072 107.297,65.072 107.647,65.072 108,65.425 108.284,65.425 108.831,64.878 123.62,64.878 124.055,65.314 134.409,65.314 135.539,64.183 136.708,64.183 138.033,65.508 162.283,65.508 162.975,66.2 199.023,66.2 199.964,65.259 200.771,65.259 201.011,65.499 215.604,65.499 216.072,65.967 216.072,66.156 216.406,66.49 J12.B8@216.639,66.49
SLOT6.LVDS_8_N: IC7F.48 J12.F8 R166F.2 | length 89.9
  Top Layer w0.095: IC7F.48@133.629,88.229 133.629,87.888 133.512,87.771 133.512,87.601 133.536,87.577 133.536,87.332 133.592,87.277 133.631,87.277 133.873,87.034 R166F.2@133.873,87.014 133.873,86.994 133.631,86.752 133.592,86.752 133.536,86.696 133.536,86.562 133.648,86.45 136.461,86.45 157.161,65.75 199.527,65.75 199.796,65.481 210.03,65.481 210.251,65.702 211.276,65.702 211.605,66.032 211.605,66.111 211.226,66.49 J12.F8@211.039,66.49
SLOT6.LVDS_8_P: IC7F.47 J12.E8 R166F.1 | length 90.8
  Top Layer w0.095: IC7F.47@133.129,88.229 133.129,87.888 133.246,87.771 133.246,87.491 133.27,87.467 133.27,87.332 133.214,87.277 133.176,87.277 132.933,87.034 R166F.1@132.933,87.014 132.933,86.994 133.176,86.752 133.214,86.752 133.27,86.696 133.27,86.451 133.538,86.183 136.35,86.183 157.05,65.483 199.417,65.483 199.686,65.214 210.141,65.214 210.362,65.436 211.386,65.436 211.872,65.921 211.872,66.111 212.252,66.49 J12.E8@212.439,66.49
SLOT6.LVDS_9_N: IC7F.4 J12.I8 R168F.2 | length 86
  Top Layer w0.095: IC7F.4@134.329,90.429 134.67,90.429 134.787,90.313 135.026,90.313 135.03,90.317 135.363,90.317 135.418,90.373 135.418,90.411 135.661,90.654 R168F.2@135.681,90.654 135.701,90.654 135.943,90.411 135.943,90.373 135.999,90.317 136.735,90.317 144.142,82.91 144.142,81.111 158.481,66.771 199.826,66.771 200.037,66.559 200.037,66.426 200.093,66.371 200.268,66.371 200.399,66.501 v1(200.476,66.501)
  Layer 1 w0.102: v1(200.476,66.501) 200.527,66.501 200.685,66.343 201.209,66.343 201.978,65.575 206.953,65.575 207.432,66.054 207.432,66.138 207.08,66.49 J12.I8@206.839,66.49
SLOT6.LVDS_9_P: IC7F.3 J12.H8 R168F.1 | length 86.3
  Top Layer w0.095: IC7F.3@134.329,89.929 134.67,89.929 134.787,90.046 135.136,90.046 135.141,90.05 135.363,90.05 135.418,89.995 135.418,89.956 135.661,89.714 R168F.1@135.681,89.714 135.701,89.714 135.943,89.956 135.943,89.995 135.999,90.05 136.625,90.05 143.875,82.8 143.875,81 158.371,66.504 199.715,66.504 199.771,66.449 199.771,66.316 199.983,66.104 200.267,66.104 200.398,65.973 v1(200.475,65.973)
  Layer 1 w0.102: v1(200.475,65.973) 200.527,65.973 200.684,66.129 201.121,66.129 201.889,65.361 207.042,65.361 207.646,65.965 207.646,66.138 207.998,66.49 J12.H8@208.239,66.49
SLOT6.LVDS_10_N: IC7F.10 J12.L8 R170F.2 | length 81.7
  Top Layer w0.095: IC7F.10@134.329,93.429 134.67,93.429 134.787,93.313 135.032,93.313 135.064,93.281 135.358,93.281 135.413,93.336 135.413,93.375 135.656,93.617 R170F.2@135.676,93.617 135.696,93.617 135.938,93.375 135.938,93.336 135.994,93.281 136.239,93.281 146.4,83.119 146.4,80.75 159.375,67.775 200.213,67.775 201.71,66.278 201.871,66.278 202.179,65.97 202.258,65.97 202.639,66.351 J12.L8@202.639,66.49
SLOT6.LVDS_10_P: IC7F.9 J12.K8 R170F.1 | length 83.1
  Top Layer w0.095: IC7F.9@134.329,92.929 134.67,92.929 134.787,93.046 134.921,93.046 134.954,93.014 135.358,93.014 135.413,92.958 135.413,92.92 135.656,92.677 R170F.1@135.676,92.677 135.696,92.677 135.938,92.92 135.938,92.958 135.994,93.014 136.128,93.014 146.133,83.009 146.133,80.639 159.264,67.508 200.102,67.508 201.599,66.011 201.761,66.011 202.069,65.703 203.02,65.703 203.806,66.49 J12.K8@204.039,66.49
SLOT6.LVDS_11_N: IC7F.14 J11.C6 R172F.2 | length 88.5
  Top Layer w0.095: IC7F.14@133.129,95.129 133.129,95.471 133.246,95.588 133.246,95.832 133.272,95.859 133.272,96.013 133.216,96.069 133.178,96.069 132.935,96.312 R172F.2@132.935,96.332 132.935,96.352 133.178,96.594 133.216,96.594 133.272,96.65 133.272,96.895 133.543,97.166 177.009,97.166 182.058,92.117 191.543,92.117 191.769,91.891 197.811,91.891 199.077,90.625 215.398,90.625 215.805,91.032 215.805,91.111 215.426,91.49 J11.C6@215.239,91.49
SLOT6.LVDS_11_P: IC7F.13 J11.B6 R172F.1 | length 88.5
  Top Layer w0.095: IC7F.13@133.629,95.129 133.629,95.485 133.512,95.601 133.512,95.722 133.539,95.748 133.539,96.013 133.594,96.069 133.633,96.069 133.875,96.312 R172F.1@133.875,96.332 133.875,96.352 133.633,96.594 133.594,96.594 133.539,96.65 133.539,96.784 133.653,96.899 176.899,96.899 181.948,91.85 191.433,91.85 191.658,91.625 197.7,91.625 198.967,90.358 215.509,90.358 216.072,90.921 216.072,91.111 216.452,91.49 J11.B6@216.639,91.49
SLOT6.LVDS_12_N: IC12F.48 J11.F6 R174F.2 | length 98
  Top Layer w0.095: IC12F.48@120.829,88.229 120.829,87.888 120.712,87.771 120.712,87.642 120.772,87.581 120.772,87.337 120.828,87.281 120.867,87.281 121.109,87.038 R174F.2@121.109,87.018 121.109,86.998 120.867,86.756 120.828,86.756 120.772,86.7 120.772,86.566 120.828,86.51 121.486,86.51 121.701,86.725 122.712,86.725 122.842,86.855 v1(122.925,86.855)
  Int2 (Sign) w0.102: v1(122.925,86.855) 122.977,86.855 123.134,86.699 125.424,86.699 126.564,87.839 133.489,87.839 135.175,89.525 136.722,89.525 139.236,92.039 193.111,92.039 195.486,89.664 201,89.664 201.157,89.82 v1(201.2,89.82)
  Bottom Layer w0.095: v1(201.2,89.82) 201.278,89.82 201.408,89.69 201.492,89.69 201.548,89.746 201.548,90.033 202.181,90.667 211.24,90.667 211.605,91.032 211.605,91.111 211.226,91.49 J11.F6@211.039,91.49
SLOT6.LVDS_12_P: IC12F.47 J11.E6 R174F.1 | length 99
  Top Layer w0.095: IC12F.47@120.329,88.34 IC12F.47@120.329,88.229 120.329,87.888 120.446,87.771 120.446,87.531 120.506,87.471 120.506,87.337 120.45,87.281 120.412,87.281 120.169,87.038 R174F.1@120.169,87.018 120.169,86.998 120.412,86.756 120.45,86.756 120.506,86.7 120.506,86.455 120.718,86.244 121.596,86.244 121.811,86.458 122.712,86.458 122.842,86.328 v1(122.925,86.328)
  Int2 (Sign) w0.102: v1(122.925,86.328) 122.977,86.328 123.134,86.485 125.512,86.485 126.653,87.625 133.578,87.625 135.264,89.311 136.811,89.311 139.325,91.825 193.022,91.825 195.397,89.45 201,89.45 201.157,89.293 v1(201.2,89.293)
  Bottom Layer w0.095: v1(201.2,89.293) 201.278,89.293 201.408,89.424 201.602,89.424 201.814,89.635 201.814,89.923 202.292,90.4 211.351,90.4 211.872,90.921 211.872,91.111 212.252,91.49 J11.E6@212.439,91.49
SLOT6.LVDS_13_N: IC12F.4 J11.I6 R178F.2 | length 90.6
  Top Layer w0.095: IC12F.4@121.529,90.429 121.87,90.429 121.987,90.313 122.232,90.313 122.252,90.292 122.514,90.292 122.57,90.348 122.57,90.387 122.812,90.629 R178F.2@122.832,90.629 122.852,90.629 123.095,90.387 123.095,90.348 123.151,90.292 123.467,90.292 123.597,90.423 v1(123.675,90.423)
  Int2 (Sign) w0.102: v1(123.675,90.423) 123.727,90.423 123.884,90.266 127.041,90.266 128.664,91.889 133.739,91.889 135.814,93.964 137.139,93.964 138.164,92.939 188.352,92.939 188.519,92.772 188.831,92.772 188.998,92.939 194.164,92.939 196.284,90.818 197.116,90.818 197.273,90.975 v1(197.325,90.975)
  Layer 1 w0.102: v1(197.325,90.975) 197.377,90.975 197.534,90.818 197.755,90.818 197.949,90.625 207.003,90.625 207.432,91.054 207.432,91.138 207.08,91.49 J11.I6@206.839,91.49
SLOT6.LVDS_13_P: IC12F.3 J11.H6 R178F.1 | length 90.9
  Top Layer w0.095: IC12F.3@121.529,89.929 121.87,89.929 121.987,90.046 122.121,90.046 122.142,90.026 122.514,90.026 122.57,89.97 122.57,89.932 122.812,89.689 R178F.1@122.832,89.689 122.852,89.689 123.095,89.932 123.095,89.97 123.151,90.026 123.467,90.026 123.597,89.896 v1(123.675,89.896)
  Int2 (Sign) w0.102: v1(123.675,89.896) 123.727,89.896 123.884,90.052 127.13,90.052 128.753,91.675 133.828,91.675 135.903,93.75 137.05,93.75 138.075,92.725 188.263,92.725 188.43,92.558 188.92,92.558 189.087,92.725 194.075,92.725 196.195,90.605 197.116,90.605 197.273,90.448 v1(197.325,90.448)
  Layer 1 w0.102: v1(197.325,90.448) 197.377,90.448 197.534,90.605 197.667,90.605 197.86,90.411 207.092,90.411 207.646,90.965 207.646,91.138 207.998,91.49 J11.H6@208.239,91.49
SLOT6.LVDS_14_N: IC12F.10 J11.L6 R190F.2 | length 87.9
  Top Layer w0.095: IC12F.10@121.529,93.429 121.87,93.429 121.987,93.313 122.232,93.313 122.265,93.28 122.514,93.28 122.569,93.336 122.569,93.374 122.812,93.617 R190F.2@122.832,93.617 122.852,93.617 123.094,93.374 123.094,93.336 123.15,93.28 123.342,93.28 123.472,93.41 v1(123.55,93.41)
  Int2 (Sign) w0.102: v1(123.55,93.41) 123.602,93.41 123.759,93.254 128.827,93.254 129.379,93.805 132.178,93.805 134.736,96.364 136.451,96.364 138.589,94.226 183.125,94.226 184.549,95.65 194.125,95.65 198.987,90.788 202.93,90.788 203.232,91.09 203.232,91.174 203.172,91.233 203.166,91.233 202.909,91.49 J11.L6@202.639,91.49
SLOT6.LVDS_14_P: IC12F.9 J11.K6 R190F.1 | length 88.3
  Top Layer w0.095: IC12F.9@121.529,92.929 121.87,92.929 121.987,93.046 122.121,93.046 122.154,93.013 122.514,93.013 122.569,92.958 122.569,92.919 122.812,92.677 R190F.1@122.832,92.677 122.852,92.677 123.094,92.919 123.094,92.958 123.15,93.013 123.342,93.013 123.472,92.883 v1(123.55,92.883)
  Int2 (Sign) w0.102: v1(123.55,92.883) 123.602,92.883 123.759,93.04 128.916,93.04 129.467,93.591 132.266,93.591 134.825,96.15 136.362,96.15 138.5,94.012 183.214,94.012 184.637,95.436 194.036,95.436 198.899,90.574 203.018,90.574 203.446,91.001 203.446,91.174 203.505,91.233 203.512,91.233 203.769,91.49 J11.K6@204.039,91.49
SLOT6.LVDS_15_N: IC12F.14 J33.F6 R192F.2 | length 129.4
  Top Layer w0.095: IC12F.14@120.329,95.019 IC12F.14@120.329,95.129 120.329,95.471 120.446,95.588 120.446,95.832 120.449,95.836 120.449,96.036 120.393,96.091 120.355,96.091 120.112,96.334 R192F.2@120.112,96.354 120.112,96.374 120.355,96.616 120.393,96.616 120.449,96.672 120.449,96.917 120.698,97.166 124.762,97.166 124.978,96.95 125.041,96.95 125.206,96.785 125.461,96.785 v1(125.501,96.745)
  Layer 1 w0.102: v1(125.501,96.745) 125.509,96.737 125.509,96.452 125.568,96.393 125.702,96.393 126.82,95.275 134.325,95.275 135.489,96.439 137.364,96.439 186.4,47.403 186.4,40.575 198.036,28.939 198.636,28.939 199.011,28.564 200.74,28.564 201.474,27.83 201.474,27.609 201.63,27.452 v1(201.63,27.4)
  Bottom Layer w0.095: v1(201.63,27.4) 201.556,27.4 201.5,27.344 201.5,27.15 202.05,26.6 211.128,26.6 211.605,27.077 211.605,27.156 211.271,27.49 J33.F6@211.039,27.49
SLOT6.LVDS_15_P: IC12F.13 J33.E6 R192F.1 | length 129.3
  Top Layer w0.095: IC12F.13@120.829,95.129 120.829,95.471 120.712,95.588 120.712,95.722 120.716,95.725 120.716,96.036 120.771,96.091 120.81,96.091 121.052,96.334 R192F.1@121.052,96.354 121.052,96.374 120.81,96.616 120.771,96.616 120.716,96.672 120.716,96.806 120.808,96.899 124.651,96.899 124.867,96.683 124.93,96.683 125.018,96.595 125.018,96.38 v1(125.058,96.34)
  Layer 1 w0.102: v1(125.058,96.34) 125.101,96.298 125.36,96.298 125.48,96.179 125.614,96.179 126.731,95.061 134.414,95.061 135.578,96.225 137.275,96.225 186.186,47.314 186.186,40.486 197.947,28.725 198.547,28.725 198.922,28.35 200.651,28.35 201.26,27.742 201.26,27.609 201.103,27.452 v1(201.103,27.4)
  Bottom Layer w0.095: v1(201.103,27.4) 201.178,27.4 201.233,27.344 201.233,27.039 201.939,26.333 211.239,26.333 211.872,26.967 211.872,27.156 212.206,27.49 J33.E6@212.439,27.49
SLOT6.LVDSr0_N: IC6.L24 R38.1 | length 13.3
  Top Layer w0.095: IC6.L24@77.915,36.784 v1(78.315,36.384)
  Bottom Layer w0.095: v1(78.315,36.384) 78.397,36.384 78.582,36.2 78.582,36.01 79.649,34.943 80.34,34.943 81.825,33.458 83.089,33.458 83.814,32.733 87.272,32.733 88.008,33.469 88.803,33.469 88.859,33.413 88.859,33.378 89.021,33.216 R38.1@89.041,33.216
SLOT6.LVDSr0_P: IC6.K24 R28.1 | length 12.9
  Top Layer w0.095: IC6.K24@78.715,36.784 v1(79.115,36.384)
  Bottom Layer w0.095: v1(79.115,36.384) 79.033,36.384 78.848,36.2 78.848,36.121 79.76,35.21 80.451,35.21 81.936,33.725 83.2,33.725 83.925,33 87.161,33 87.897,33.736 88.797,33.736 88.853,33.791 88.853,33.824 89.016,33.986 R28.1@89.036,33.986
SLOT6.LVDSr1_N: IC6.N22 R281.1 | length 7.8
  Top Layer w0.095: IC6.N22@76.29,38.384 v1(76.69,37.984)
  Bottom Layer w0.095: v1(76.69,37.984) 76.674,37.984 76.482,37.792 76.452,37.792 76.074,37.413 76.074,36.118 76.125,36.067 76.125,34.675 76.325,34.475 76.359,34.441 76.899,33.901 cw(c76.826,33.828) 76.899,33.755 ; 76.899,33.754 ccw(c76.972,33.681) 76.899,33.608 76.962,33.546 ccw(c77.035,33.619) 77.108,33.546 cw(c77.181,33.473) 77.254,33.546 77.288,33.512 78.028,32.772 78.028,32.468 77.972,32.412 77.938,32.412 77.775,32.25 R281.1@77.775,32.23
SLOT6.LVDSr1_P: IC6.N21 R279.1 | length 8.6
  Top Layer w0.095: IC6.N21@76.316,39.159 v1(76.7,38.775)
  Bottom Layer w0.095: v1(76.7,38.775) 76.758,38.717 76.758,38.445 77.064,38.139 77.064,37.829 76.761,37.525 76.563,37.525 76.34,37.303 76.34,36.229 76.391,36.178 76.391,34.786 78.294,32.883 78.294,32.468 78.35,32.412 78.384,32.412 78.547,32.25 R279.1@78.547,32.23
SLOT6.LVDSr3_N: IC6.D1 R156.1 | length 3.5
  Top Layer w0.095: IC6.D1@83.515,55.184 83.515,55.16 v1(83.9,54.775)
  Bottom Layer w0.095: v1(83.9,54.775) 83.935,54.81 84.16,54.81 84.215,54.865 84.215,54.908 84.591,55.284 85.228,55.284 85.855,54.656 85.99,54.656 86.045,54.712 86.045,54.75 86.208,54.913 R156.1@86.228,54.913
SLOT6.LVDSr3_P: IC6.E3 R154.1 | length 4.5
  Top Layer w0.095: IC6.E3@82.715,53.584 v1(83.115,53.984)
  Bottom Layer w0.095: v1(83.115,53.984) 83.115,53.987 83.528,54.401 84.128,54.401 84.482,54.755 84.482,54.797 84.702,55.017 85.118,55.017 85.745,54.39 85.991,54.39 86.046,54.334 86.046,54.296 86.209,54.134 R154.1@86.229,54.134
SLOT7.LVDS_0_N: J29.I4 R274.1 R275.2 | length 122
  Bottom Layer w0.095: R275.2@89.728,35.484 89.748,35.484 89.911,35.321 89.911,35.287 89.971,35.226 90.257,35.226 90.271,35.24 90.313,35.24 R274.1@90.475,35.403 ; R274.1@90.475,35.423 R274.1@90.475,35.403 ; J29.I4@206.839,39.49 207.026,39.49 207.405,39.111 207.405,39.032 207.139,38.765 201.787,38.765 200.887,39.665 193.31,39.665 192.783,40.192 187.512,40.192 186.904,40.8 142.573,40.8 140.689,38.917 111.714,38.917 110.964,38.167 95.318,38.167 92.378,35.226 90.693,35.226 90.679,35.24 90.638,35.24 R274.1@90.475,35.403
SLOT7.LVDS_0_P: J29.H4 R273.2 R274.2 | length 122.5
  Bottom Layer w0.095: R273.2@89.728,34.712 89.748,34.712 89.911,34.874 89.911,34.904 89.966,34.959 90.257,34.959 90.271,34.945 90.313,34.945 R274.2@90.475,34.783 ; R274.2@90.475,34.763 R274.2@90.475,34.783 ; J29.H4@208.239,39.49 208.052,39.49 207.672,39.111 207.672,38.921 207.249,38.499 201.676,38.499 200.776,39.399 193.199,39.399 192.673,39.925 187.402,39.925 186.794,40.533 142.683,40.533 140.8,38.65 111.825,38.65 111.075,37.9 95.429,37.9 92.488,34.959 90.693,34.959 90.679,34.945 90.638,34.945 R274.2@90.475,34.783
SLOT7.LVDS_1_N: J29.L4 R251.1 R252.2 | length 124
  Top Layer w0.095: R252.2@89.653,35.364 89.673,35.364 89.879,35.158 89.97,35.158 90.182,35.158 90.196,35.173 90.237,35.173 R251.1@90.4,35.335 ; R251.1@90.4,35.355 R251.1@90.4,35.335 ; v1(184.05,46.052) 183.972,46.052 183.842,45.922 180.511,45.922 179.491,46.942 172.042,46.942 171.022,45.922 104.47,45.922 102.023,43.475 97.623,43.475 90.85,36.702 90.85,35.256 90.752,35.158 90.618,35.158 90.604,35.173 90.562,35.173 R251.1@90.4,35.335
  Int2 (Sign) w0.102: v1(184.05,46.052) 184.102,46.052 184.259,45.895 184.622,45.895 184.804,45.713 185.337,45.713 189.911,41.139 193.414,41.139 195.028,39.525 200.903,39.525 201.628,38.8 202.122,38.8 202.134,38.788 202.966,38.788 203.232,39.054 203.232,39.138 202.88,39.49 J29.L4@202.639,39.49
SLOT7.LVDS_1_P: J29.K4 R250.2 R251.2 | length 124.4
  Top Layer w0.095: R250.2@89.653,34.593 89.673,34.593 89.836,34.755 89.836,34.815 89.912,34.892 90.081,34.892 90.182,34.892 90.196,34.877 90.237,34.877 R251.2@90.4,34.715 ; R251.2@90.4,34.695 R251.2@90.4,34.715 ; v1(184.05,45.525) 183.972,45.525 183.842,45.655 180.7,45.655 180.4,45.655 179.38,46.675 172.152,46.675 171.132,45.655 104.58,45.655 102.133,43.208 97.733,43.208 91.117,36.592 91.117,35.145 90.863,34.892 90.618,34.892 90.604,34.877 90.562,34.877 R251.2@90.4,34.715
  Int2 (Sign) w0.102: v1(184.05,45.525) 184.102,45.525 184.259,45.682 184.533,45.682 184.716,45.499 185.249,45.499 189.822,40.925 193.325,40.925 194.939,39.311 200.814,39.311 201.539,38.586 202.033,38.586 202.045,38.574 203.054,38.574 203.446,38.965 203.446,39.138 203.798,39.49 J29.K4@204.039,39.49
SLOT7.LVDS_2_N: IC6.K21 J29.H1 | length 141.9
  Top Layer w0.095: v1(78.35,38.8) 78.35,38.819 IC6.K21@78.715,39.184
  Layer 1 w0.102: v1(78.35,38.8) 78.728,38.422 79.54,38.422 79.609,38.353 80.52,38.353 81.749,37.123 81.749,36.945 81.75,36.138 83.175,34.713 83.175,32.372 86.611,28.936 87.064,28.483 90.161,28.483 90.614,28.936 95.466,28.936 95.623,28.78 v1(95.675,28.78) ; v1(200.85,33.9) 200.85,33.848 200.693,33.691 200.693,33.457 201.388,32.762 208.44,32.762 208.732,33.054 208.732,33.138 208.38,33.49 J29.H1@208.139,33.49
  Bottom Layer w0.095: v1(95.675,28.78) 95.753,28.78 95.883,28.91 96.23,28.91 96.442,29.122 96.442,29.364 99.311,32.233 115.058,32.233 115.608,32.783 116.2,32.783 193.908,32.783 194.222,33.097 197.517,33.097 197.82,33.4 199.828,33.4 199.992,33.235 200.508,33.235 200.72,33.447 200.72,33.692 200.85,33.822 v1(200.85,33.9)
SLOT7.LVDS_2_P: IC6.J21 J29.G1 | length 140.6
  Top Layer w0.095: IC6.J21@79.515,39.184 v1(79.915,38.784) v1@79.915,38.867
  Layer 1 w0.102: v1(79.915,38.784) 79.915,38.764 80.112,38.567 80.608,38.567 81.963,37.212 81.963,37.033 ; 81.964,37.033 81.964,36.227 83.389,34.802 83.389,32.461 86.7,29.15 87.153,28.697 90.072,28.697 90.525,29.15 95.466,29.15 95.623,29.307 v1(95.675,29.307) ; v1(200.323,33.9) 200.323,33.848 200.48,33.691 200.48,33.368 201.299,32.548 208.529,32.548 208.946,32.965 208.946,33.138 209.298,33.49 J29.G1@209.539,33.49
  Bottom Layer w0.095: v1(95.675,29.307) 95.753,29.307 95.883,29.176 96.119,29.176 96.175,29.232 96.175,29.475 99.2,32.5 114.948,32.5 115.498,33.05 116.2,33.05 193.798,33.05 194.111,33.364 197.407,33.364 197.709,33.666 199.938,33.666 200.102,33.502 200.397,33.502 200.453,33.558 200.453,33.692 200.323,33.822 v1(200.323,33.9)
SLOT7.LVDS_3_N: J29.C8 R158.1 R159.2 | length 137.5
  Layer 1 w0.102: v1(198.552,50.352) 198.589,50.315 198.811,50.315 199.551,49.575 205.878,49.575 206.278,49.975 212.905,49.975 214.586,48.294 215.464,48.294 215.832,47.926 215.832,47.842 215.48,47.49 J29.C8@215.239,47.49
  Bottom Layer w0.095: R159.2@86.892,55.638 86.912,55.638 87.074,55.8 87.074,55.841 87.13,55.896 87.437,55.896 87.463,55.87 87.504,55.87 R158.1@87.667,55.708 ; R158.1@87.667,55.688 R158.1@87.667,55.708 ; v1(198.552,50.352) 198.497,50.408 198.497,50.592 196.714,52.375 144.575,52.375 143.725,51.525 138.4,51.525 135.724,48.85 113.101,48.85 111.875,50.075 99.298,50.075 98.823,50.55 98.572,50.55 98.473,50.648 96.375,50.648 96.137,50.886 95.303,50.886 93.82,52.369 93.82,53.166 93.675,53.311 93.675,53.905 92.349,55.23 91.895,55.23 91.24,55.885 87.885,55.885 87.871,55.87 87.829,55.87 R158.1@87.667,55.708
SLOT7.LVDS_3_P: J29.B8 R157.2 R158.2 | length 137.9
  Layer 1 w0.102: v1(198.925,50.725) 198.962,50.688 198.962,50.467 199.64,49.789 205.789,49.789 206.189,50.189 212.994,50.189 214.675,48.508 215.553,48.508 216.046,48.015 216.046,47.842 216.398,47.49 J29.B8@216.639,47.49
  Bottom Layer w0.095: R157.2@86.889,56.419 86.909,56.419 87.071,56.256 87.071,56.219 87.127,56.163 87.448,56.163 87.451,56.165 87.504,56.165 87.667,56.328 87.829,56.165 87.871,56.165 87.885,56.151 91.351,56.151 92.005,55.497 92.46,55.497 93.942,54.015 93.942,53.421 94.087,53.276 94.087,52.48 95.413,51.153 96.247,51.153 96.486,50.915 98.584,50.915 98.682,50.816 98.934,50.816 99.408,50.342 111.986,50.342 113.211,49.116 135.614,49.116 138.289,51.792 143.614,51.792 144.464,52.642 196.824,52.642 198.686,50.78 198.87,50.78 v1(198.925,50.725)
SLOT7.LVDS_4_N: IC6.D3 J29.F8 | length 135.4
  Top Layer w0.095: IC6.D3@83.515,53.584 v1(83.915,53.984) ; v1(98.425,49.675) 98.425,50.1 98.775,50.45 103.783,50.45 106.45,47.784 142.784,47.784 144.149,49.149 197.265,49.149 197.914,48.499 199.067,48.499 199.197,48.368 v1(199.275,48.368)
  Int2 (Sign) w0.102: v1(199.275,48.368) 199.432,48.525 200.211,48.525 200.861,49.175 210.907,49.175 211.632,48.45 211.632,48.083 J29.F8@211.039,47.49
  Layer 1 w0.102: v1(83.915,53.984) 83.964,53.935 83.964,53.644 84.337,53.271 84.337,53.028 84.558,52.806 85.004,52.806 85.497,53.3 92.253,53.3 93.978,51.575 96.799,51.575 98.268,50.105 98.268,49.884 98.425,49.727 v1(98.425,49.675)